# Altium PCB BeagleBone_adapter.PcbDoc (part 1 of 2)
Units mm, origin at the board's own origin, x right, y up, seen from the top; angles counter-clockwise.
Board outline 72.96 x 54.66 mm, 2 copper layers (Top Layer, Bottom Layer), stack 1.071 mm thick; 99 components, 121 nets, 467 pads, 161 vias.
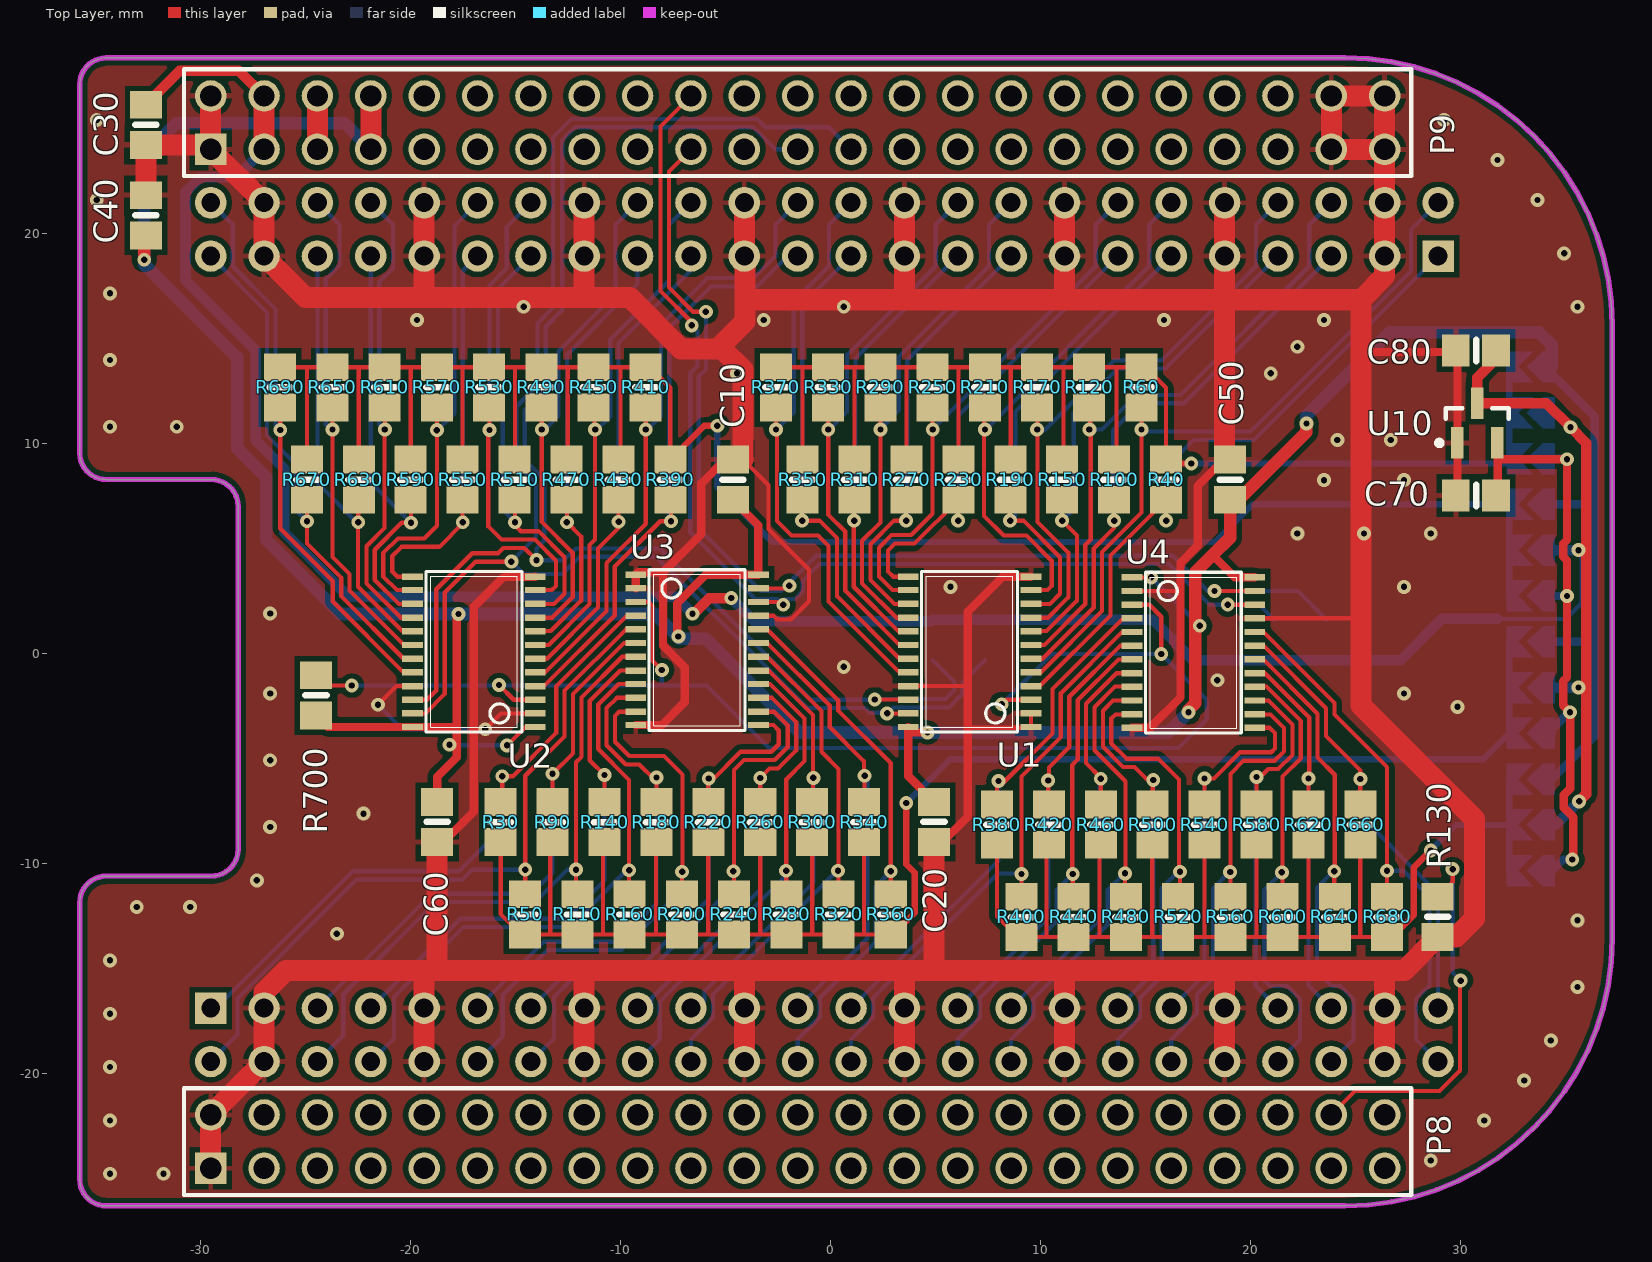
[diagram p0: Top Layer view]
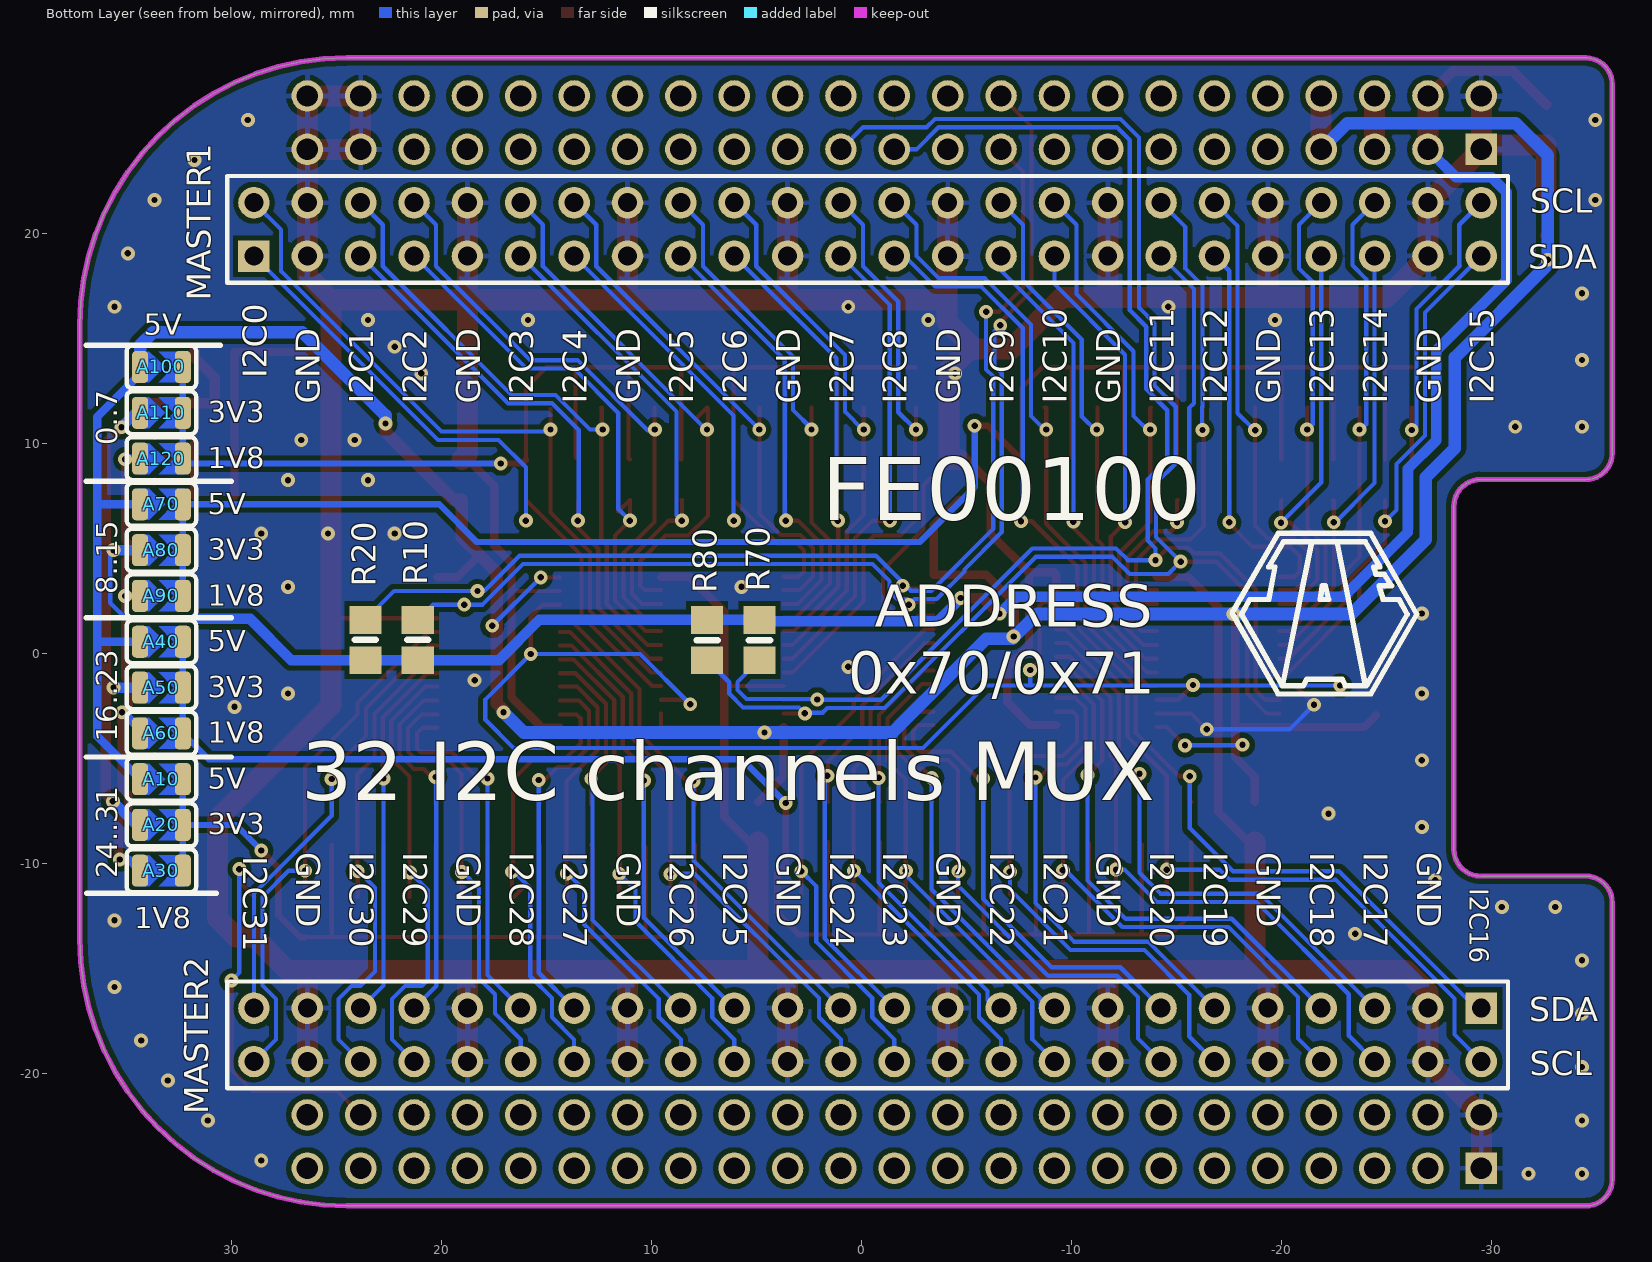
[diagram p1: Bottom Layer view, seen from below]

## Layer stack, top to bottom
Top Solder: solder mask 0.0102, Solder Resist, Dk 3.5
Top Layer: signal copper 0.0356
Dielectric1: core 1, FR-4, Dk 4.8
Bottom Layer: signal copper 0.0356
Bottom Solder: solder mask 0.0102, Solder Resist, Dk 3.5

## Board outline
-35.738,-25.021 ccw(c-34.468,-25.021) -34.468,-26.291 -23.752,-26.291 24.492,-26.284 24.492,-26.296 25.602,-26.248 26.702,-26.103 27.786,-25.862 28.845,-25.529 29.87,-25.104 30.855,-24.591 31.791,-23.995 32.672,-23.319 33.49,-22.569 34.24,-21.751 34.916,-20.87 35.512,-19.934 36.025,-18.949 36.45,-17.923 36.784,-16.865 37.024,-15.781 37.169,-14.68 37.217,-13.571 37.205,15.639 37.217,15.639 37.169,16.748 37.024,17.848 36.784,18.932 36.45,19.991 36.025,21.017 35.512,22.001 34.916,22.937 34.24,23.818 33.49,24.637 32.672,25.387 31.791,26.062 30.855,26.659 29.87,27.171 28.845,27.596 27.786,27.93 26.702,28.17 25.602,28.315 24.492,28.364 -26.957,28.354 -34.468,28.354 ccw(c-34.468,27.084) -35.738,27.084 -35.738,9.55 ccw(c-34.468,9.55) -34.468,8.28 -29.464,8.28 cw(c-29.464,7.01) -28.194,7.01 -28.194,-9.322 cw(c-29.464,-9.322) -29.464,-10.592 -34.468,-10.592 ccw(c-34.468,-11.862) -35.738,-11.862

## Design rules (kind name [scope] priority, off if disabled: settings)
Clearance Clearance_1 [All vs InPolygon] p1: gap=0.25
Clearance [All] p2: gap=0.2
ComponentClearance [All] p1 off: gap=0.254 collisioncheckmode=3 verticalgap=0.254 showdistances=FALSE
Height [All] p1: minheight=0 maxheight=50 prefheight=12.7
HoleSize [All] p1: absolutevalues=TRUE maxlimit=4.2 minlimit=0.025 maxpercent=80.000 minpercent=20.000
PolygonConnect PolygonConnect_2 [InNet('CHAIN1') or InNet('CHAIN2') or InNet('CHAIN3') or InNet('ISL_SUPPLY')] p1: connectstyle=Direct reliefconductorwidth=0.254 reliefentries=4 polygonreliefangle="90 Angle" airgapwidth=0.254
PolygonConnect [ispad] p2: connectstyle=Relief reliefconductorwidth=0.254 reliefentries=4 polygonreliefangle="90 Angle" airgapwidth=0.254
PolygonConnect PolygonConnect_1 [All] p3: connectstyle=Direct reliefconductorwidth=0.254 reliefentries=4 polygonreliefangle="90 Angle" airgapwidth=0.254
RoutingVias [All] p1: holewidth=0.3 width=0.6 viastyle="Through Hole" minholewidth=0.2 minwidth=0.5 maxholewidth=3.81 maxwidth=5.08
SilkToBoardRegionClearance [All] p1 off:
SilkToSilkClearance [All] p1 off: silktosilkclearance=0.254
SilkToSolderMaskClearance SilkscreenOverComponentPads [IsPad] p1 off: minsilkscreentomaskgap=0.254 clearancetoexposedcopper=TRUE
SolderMaskExpansion [All] p1: expansion=0.102
UnpouredPolygon [All] p1: allowunpoured=FALSE
Width [All] p1: maxlimit=10 minlimit=0.15 preferedwidth=0.3 minimp=50.000000 maximp=50.000000 favimp=50.000000
23 further rules are at their usual default settings.

## Components (designator, comment, footprint, x,y, rotation, side; value= is the part's Value field where it differs from the comment)
A10 "SOLDERJUMPER" SOLDERJUMPER_ARROW_NOPASTE 33.325,-5.978 r180 bottom
A20 "SOLDERJUMPER" SOLDERJUMPER_ARROW_NOPASTE 33.325,-8.158 r180 bottom
A30 "SOLDERJUMPER" SOLDERJUMPER_ARROW_NOPASTE 33.325,-10.338 r180 bottom
A40 "SOLDERJUMPER" SOLDERJUMPER_ARROW_NOPASTE 33.325,0.561 r180 bottom
A50 "SOLDERJUMPER" SOLDERJUMPER_ARROW_NOPASTE 33.325,-1.619 r180 bottom
A60 "SOLDERJUMPER" SOLDERJUMPER_ARROW_NOPASTE 33.325,-3.798 r180 bottom
A70 "SOLDERJUMPER" SOLDERJUMPER_ARROW_NOPASTE 33.325,7.1 r180 bottom
A80 "SOLDERJUMPER" SOLDERJUMPER_ARROW_NOPASTE 33.325,4.921 r180 bottom
A90 "SOLDERJUMPER" SOLDERJUMPER_ARROW_NOPASTE 33.325,2.741 r180 bottom
A100 "SOLDERJUMPER" SOLDERJUMPER_ARROW_NOPASTE 33.325,13.64 r180 bottom
A110 "SOLDERJUMPER" SOLDERJUMPER_ARROW_NOPASTE 33.325,11.46 r180 bottom
A120 "SOLDERJUMPER" SOLDERJUMPER_ARROW_NOPASTE 33.325,9.28 r180 bottom
C10 "Cap Semi" 0805-NO -4.648,8.265 r90 top
C20 "Cap Semi" 0805-NO 4.928,-8.011 r270 top
C30 "Cap Semi" 0805-no -32.588,25.171 r270 top
C40 "Cap Semi" 0805-no -32.588,20.853 r90 top
C50 "Cap Semi" 0805-NO 19.025,8.265 r90 top
C60 "Cap Semi" 0805-NO -18.72,-8.011 r270 top
C70 "Cap Semi" 0805-NO 30.734,7.518 r180 top
C80 "Cap Semi" 0805-NO 30.734,14.427 r180 top
MASTER1 "Header 24X2" HDR2X24 28.92,18.92 r180 bottom locked
MASTER2 "Header 24X2" HDR2X24 -29.5,-16.88 r0 bottom locked
P8 "Header 23x2 IDC" tlw-125-05-g-d -29.5,-24.5 r0 top
P9 "Header 23x2 IDC" tlw-125-05-g-d -29.5,24 r0 top
R10 "Res2" 0805-NO 21.124,0.65 r270 bottom
R20 "Res2" 0805-NO 23.622,0.65 r270 bottom
R30 "Res2" 0805-NO -15.697,-8.026 r90 top
R40 "Res2" 0805-NO 15.972,8.28 r270 top
R50 "Res2" 0805-NO -14.529,-12.421 r90 top
R60 "Res2" 0805-NO 14.803,12.675 r270 top
R70 "Res2" 0805-NO 4.851,0.635 r90 bottom
R80 "Res2" 0805-NO 7.349,0.635 r90 bottom
R90 "Res2" 0805-NO -13.226,-8.026 r90 top
R100 "Res2" 0805-NO 13.501,8.28 r270 top
R110 "Res2" 0805-NO -12.043,-12.421 r90 top
R120 "Res2" 0805-NO 12.318,12.675 r270 top
R130 "Res2" 0805-no 28.905,-12.532 r270 top
R140 "Res2" 0805-NO -10.755,-8.026 r90 top
R150 "Res2" 0805-NO 11.03,8.28 r270 top
R160 "Res2" 0805-NO -9.558,-12.421 r90 top
R170 "Res2" 0805-NO 9.832,12.675 r270 top
R180 "Res2" 0805-NO -8.284,-8.026 r90 top
R190 "Res2" 0805-NO 8.559,8.28 r270 top
R200 "Res2" 0805-NO -7.072,-12.421 r90 top
R210 "Res2" 0805-NO 7.347,12.675 r270 top
R220 "Res2" 0805-NO -5.813,-8.026 r90 top
R230 "Res2" 0805-NO 6.088,8.28 r270 top
R240 "Res2" 0805-NO -4.587,-12.421 r90 top
R250 "Res2" 0805-NO 4.861,12.675 r270 top
R260 "Res2" 0805-NO -3.342,-8.026 r90 top
R270 "Res2" 0805-NO 3.617,8.28 r270 top
R280 "Res2" 0805-NO -2.101,-12.421 r90 top
R290 "Res2" 0805-NO 2.376,12.675 r270 top
R300 "Res2" 0805-NO -0.871,-8.026 r90 top
R310 "Res2" 0805-NO 1.146,8.28 r270 top
R320 "Res2" 0805-NO 0.384,-12.421 r90 top
R330 "Res2" 0805-NO -0.11,12.675 r270 top
R340 "Res2" 0805-NO 1.6,-8.026 r90 top
R350 "Res2" 0805-NO -1.325,8.28 r270 top
R360 "Res2" 0805-NO 2.87,-12.421 r90 top
R370 "Res2" 0805-NO -2.595,12.675 r270 top
R380 "Res2" 0805-NO 7.925,-8.153 r90 top
R390 "Res2" 0805-NO -7.625,8.28 r270 top
R400 "Res2" 0805-NO 9.093,-12.548 r90 top
R410 "Res2" 0805-NO -8.793,12.675 r270 top
R420 "Res2" 0805-NO 10.396,-8.153 r90 top
R430 "Res2" 0805-NO -10.096,8.28 r270 top
R440 "Res2" 0805-NO 11.579,-12.548 r90 top
R450 "Res2" 0805-NO -11.279,12.675 r270 top
R460 "Res2" 0805-NO 12.867,-8.153 r90 top
R470 "Res2" 0805-NO -12.567,8.28 r270 top
R480 "Res2" 0805-NO 14.064,-12.548 r90 top
R490 "Res2" 0805-NO -13.764,12.675 r270 top
R500 "Res2" 0805-NO 15.338,-8.153 r90 top
R510 "Res2" 0805-NO -15.038,8.28 r270 top
R520 "Res2" 0805-NO 16.55,-12.548 r90 top
R530 "Res2" 0805-NO -16.25,12.675 r270 top
R540 "Res2" 0805-NO 17.809,-8.153 r90 top
R550 "Res2" 0805-NO -17.509,8.28 r270 top
R560 "Res2" 0805-NO 19.035,-12.548 r90 top
R570 "Res2" 0805-NO -18.735,12.675 r270 top
R580 "Res2" 0805-NO 20.28,-8.153 r90 top
R590 "Res2" 0805-NO -19.98,8.28 r270 top
R600 "Res2" 0805-NO 21.521,-12.548 r90 top
R610 "Res2" 0805-NO -21.221,12.675 r270 top
R620 "Res2" 0805-NO 22.751,-8.153 r90 top
R630 "Res2" 0805-NO -22.451,8.28 r270 top
R640 "Res2" 0805-NO 24.006,-12.548 r90 top
R650 "Res2" 0805-NO -23.706,12.675 r270 top
R660 "Res2" 0805-NO 25.222,-8.153 r90 top
R670 "Res2" 0805-NO -24.922,8.28 r270 top
R680 "Res2" 0805-NO 26.492,-12.548 r90 top
R690 "Res2" 0805-NO -26.192,12.675 r270 top
R700 "Res2" 0805-NO -24.486,-1.981 r270 top
U1 "TCA9548APWR" TSSOP24 6.625,0.076 r90 top
U2 "TCA9548APWR" TSSOP24 -16.972,0.076 r90 top
U3 "TCA9548APWR" TSSOP24 -6.35,0.178 r270 top
U4 "TCA9548APWR" TSSOP24 17.272,0.051 r270 top
U10 "MCP1700T-1802E/TT" SOT-23-TT3_N 30.785,10.973 r90 top

## Footprints (in the part's own frame and the unit in brackets; to place one, negate y for a bottom-side part, rotate by r counter-clockwise, add the part's x,y. Pads: shape width x height; smd on the part's side, far side on the other; paste and mask are expansions set on the pad)
0805-NO [mil] "0805-NO"
  rect 52x60 smd: 1(-37.4,0) 2(38,0)
  silkscreen extent 0,-20 0,20
0805-no [mil] "0805-NO"
  rect 52x60 smd: 1(-37.4,0) 2(38,0)
  silkscreen extent 0,-20 0,20
HDR2X24 [mm] "Connector; Header; 24x2 Position"
  rect 1.5x1.5 hole 0.9: 1(0,0)
  round 1.5 hole 0.9: 2(0,2.54) 3(2.54,0) 4(2.54,2.54) 5(5.08,0) 6(5.08,2.54) 7(7.62,0) 8(7.62,2.54) 9(10.16,0) 10(10.16,2.54) 11(12.7,0) 12(12.7,2.54) 13(15.24,0) 14(15.24,2.54) 15(17.78,0) 16(17.78,2.54) 17(20.32,0) 18(20.32,2.54) 19(22.86,0) 20(22.86,2.54) 21(25.4,0) 22(25.4,2.54) 23(27.94,0) 24(27.94,2.54) 25(30.48,0) 26(30.48,2.54) 27(33.02,0) 28(33.02,2.54) 29(35.56,0) 30(35.56,2.54) 31(38.1,0) 32(38.1,2.54) 33(40.64,0) 34(40.64,2.54) 35(43.18,0) 36(43.18,2.54) 37(45.72,0) 38(45.72,2.54) 39(48.26,0) 40(48.26,2.54) 41(50.8,0) 42(50.8,2.54) 43(53.34,0) 44(53.34,2.54) 45(55.88,0) 46(55.88,2.54) 47(58.42,0) 48(58.42,2.54)
  silkscreen extent -1.27,-1.27 59.69,3.81
SOLDERJUMPER_ARROW_NOPASTE [mil] "SOLDERJUMPER_ARROW_NOPASTE"
  rrect50% 30x60 smd: 1(-40,0) 2(40,0)
  Top Layer region: -45,29 -22.5,29 7,0 -22.5,-29 -45,-29
  Top Layer region: -5,29 23,0 -5,-29 45,-29 45,29
  silkscreen extent -65,-40 65,40
SOT-23-TT3_N [mm] "SOT23, 3-Leads, Body 2.9x1.3mm, Pitch 0.95mm, Lead Span 2.4mm, IPC Medium Density"
  rect 1.5x0.6 smd: 1(-0.95,0.95) 2(-0.95,-0.95) 3(0.95,0)
  silkscreen extent -1.07,-1.5 0.7,1.92, body extent -0.7,-1.5 0.7,1.5, height 1.12
tlw-125-05-g-d [mm] "pin-header-46-male"
  rect 1.5x1.5 hole 1.016: 1(0,0)
  round 1.5 hole 1.016: 2(0,2.54) 3(2.54,0) 4(2.54,2.54) 5(5.08,0) 6(5.08,2.54) 7(7.62,0) 8(7.62,2.54) 9(10.16,0) 10(10.16,2.54) 11(12.7,0) 12(12.7,2.54) 13(15.24,0) 14(15.24,2.54) 15(17.78,0) 16(17.78,2.54) 17(20.32,0) 18(20.32,2.54) 19(22.86,0) 20(22.86,2.54) 21(25.4,0) 22(25.4,2.54) 23(27.94,0) 24(27.94,2.54) 25(30.48,0) 26(30.48,2.54) 27(33.02,0) 28(33.02,2.54) 29(35.56,0) 30(35.56,2.54) 31(38.1,0) 32(38.1,2.54) 33(40.64,0) 34(40.64,2.54) 35(43.18,0) 36(43.18,2.54) 37(45.72,0) 38(45.72,2.54) 39(48.26,0) 40(48.26,2.54) 41(50.8,0) 42(50.8,2.54) 43(53.34,0) 44(53.34,2.54) 45(55.88,0) 46(55.88,2.54)
  silkscreen extent -1.27,-1.27 57.15,3.81
TSSOP24 [mil] "TSSOP24"
  rect 12x39 smd: 1(-140.75,-114.87) 2(-115.16,-114.87) 3(-89.57,-114.87) 4(-63.98,-114.87) 5(-38.39,-114.87) 6(-12.8,-114.87) 7(13,-114.87) 8(39,-114.87) 9(64,-114.87) 10(90,-114.87) 11(116,-114.87) 12(141,-114.87) 13(141,115) 14(116,115) 15(90,115) 16(64,115) 17(39,115) 18(13,115) 19(-12.8,115) 20(-38.39,115) 21(-63.98,115) 22(-89.57,115) 23(-115.16,115) 24(-140.75,115)
  silkscreen extent -150,-90 151,90

## Part data
A10 A20 A30 A40 A50 A60 A70 A80 A90 A100 A110 A120: "<p><b>SMD Solder JUMPER</b></p> / <p>Solder the two pads together to create a connection, or remove the solder to break it.</p> / <b>REFLOW</b> - Use this footprint for solder paste and reflow ovens.<br/> / <b>WAVE</b> - Use this footprint for hand-soldering (larger pads). / <p><b>CLOSED</b> - Has a trace between the two pads to ensure it is closed by default.  The trace needs to be cut to disable the jumper, and can be closed again by creating a solder bridge between the two pads.</p>"
C10 C20 C30 C40 C50 C60 C70 C80: "Capacitor (Semiconductor SIM Model)"
MASTER1 MASTER2: "Header, 24-Pin, Dual row"
P8 P9: library part HW-23-20-G-D-865-SM, "header,46 way,2.54mm"
R10 R20 R30 R40 R50 R60 R70 R80 R90 R100 R110 R120 R130 R140 R150 R160 R170 R180 R190 R200 R210 R220 R230 R240 R250 R260 R270 R280 R290 R300 R310 R320 R330 R340 R350 R360 R370 R380 R390 R400 R410 R420 R430 R440 R450 R460 R470 R480 R490 R500 R510 R520 R530 R540 R550 R560 R570 R580 R590 R600 R610 R620 R630 R640 R650 R660 R670 R680 R690 R700: "Resistor"
U1 U2 U3 U4: library part TCA9548A, "<p><b>TCA9548A I2C Multiplexer</b><p>"
U10: "Low Quiescent Current LDO, 3-Pin SOT-23, Extended Temperature, Tape and Reel"

## Via types
v1: diameter 0.66, hole 0.3, Top Layer to Bottom Layer, tented both sides, 161 vias

## Nets (pads, with @x,y where several pads share a name; then routed paths per layer and width w, separated by ;. In a path a pad name is that pad's centre, name@x,y a point inside that pad or via, vN(x,y) a via of type N, cw(c..) or ccw(c..) an arc to the next point about the centre after c; other vN are vias at no path point)
0SCL: MASTER1.2 R60.2 U1.5 | length 34.8
  Top Layer w0.2: U1.5@9.542,-0.899 10.012,-0.899 12.93,2.02 12.93,4.839 14.803,6.712 v1@14.803,10.744 ; R60.2@14.803,11.633 14.803,10.749 v1@14.808,10.744
  Bottom Layer w0.2: v1@14.808,10.744 14.986,10.566 20.001,10.566 27.635,18.201 27.635,20.175 MASTER1.2@28.92,21.46
  other v1: 14.808,10.668
0SCL2: MASTER2.2 R50.2 U3.5 | length 35
  Top Layer w0.2: R50.2@-14.605,-11.455 -14.529,-11.379 v1(-14.529,-10.287) -14.529,-5.817 -12.656,-3.943 -12.656,-1.766 -9.737,1.153 U3.5@-9.268,1.153
  Bottom Layer w0.2: MASTER2.2@-29.5,-19.42 -28.219,-18.139 -28.219,-16.415 -22.567,-10.763 -17.513,-10.763 -17.037,-10.287 -14.605,-10.287 -14.529,-10.211 v1(-14.529,-10.287)
0SDA: MASTER1.1 R40.2 U1.4 | length 32.4
  Top Layer w0.2: U1.4@9.542,-1.549 9.964,-1.549 13.33,1.817 13.33,4.674 R40.2@15.972,7.315 15.977,7.31 v1(15.977,6.325)
  Bottom Layer w0.2: v1(15.977,6.325) 15.977,8.865 17.278,10.166 20.166,10.166 MASTER1.1@28.92,18.92
0SDA2: MASTER2.1 R30.2 U3.4 | length 32
  Top Layer w0.2: R30.2@-15.697,-7.061 -15.621,-6.985 v1(-15.621,-5.842) -15.12,-5.842 -13.056,-3.778 -13.056,-1.563 -9.69,1.803 U3.4@-9.268,1.803
  Bottom Layer w0.2: MASTER2.1@-29.5,-16.88 -29.25,-16.88 -22.733,-10.363 -17.678,-10.363 -15.621,-8.306 v1(-15.621,-5.842)
1SCL: MASTER1.6 R120.2 U1.7 | length 30.1
  Top Layer w0.2: U1.7@9.542,0.406 10.185,0.406 12.13,2.351 12.13,5.171 12.39,5.431 v1@12.39,10.439 ; R120.2@12.369,11.709 12.39,11.688 12.37,11.667 v1@12.37,10.439
  Bottom Layer w0.2: v1@12.37,10.439 12.598,10.668 12.922,10.668 14.566,12.313 16.667,12.313 22.79,18.436 22.79,20.41 MASTER1.6@23.84,21.46
  other v1: 12.323,10.668
1SCL2: MASTER2.6 R110.2 U3.7 | length 30.1
  Top Layer w0.2: R110.2@-12.094,-11.455 -12.116,-11.434 v1(-12.116,-10.287) -12.116,-5.177 -11.856,-4.917 -11.856,-2.097 -9.911,-0.152 U3.7@-9.268,-0.152
  Bottom Layer w0.2: MASTER2.6@-24.42,-19.42 -23.19,-18.19 -23.19,-16.216 -18.804,-11.83 -14.058,-11.83 -12.515,-10.287 v1(-12.116,-10.287)
1SDA: MASTER1.5 R100.2 U1.6 | length 27.3
  Top Layer w0.2: U1.6@9.542,-0.249 10.096,-0.249 12.53,2.186 12.53,5.005 13.501,5.976 ; v1@13.462,6.325 13.501,6.363 R100.2@13.501,7.315
  Bottom Layer w0.2: v1@13.462,6.325 13.462,10.643 14.732,11.913 16.833,11.913 MASTER1.5@23.84,18.92
  other v1: 13.502,6.325
1SDA2: MASTER2.5 R90.2 U3.6 | length 28.1
  Top Layer w0.2: R90.2@-13.226,-7.061 v1(-13.226,-5.722) -12.256,-4.751 -12.256,-1.932 -9.821,0.503 U3.6@-9.268,0.503
  Bottom Layer w0.2: MASTER2.5@-24.42,-16.88 -18.97,-11.43 -14.224,-11.43 -13.226,-10.432 v1(-13.226,-5.722)
1V8: A30.1 A60.1 A90.1 A120.1 C70.1 U10.2 | length 30.5
  Top Layer w0.4: C70.1@31.76,7.518 31.76,9.997 U10.2@31.735,10.023 31.735,9.616 U10.2@31.76,9.591 ; 31.76,9.261 31.775,9.246 v1(35.059,9.246) 35.059,5.408 34.874,5.223 34.874,4.618 35.059,4.433 35.059,-1.131 34.874,-1.316 34.874,-2.463 v1(35.204,-2.794) 35.204,-6.435 34.906,-6.733 34.906,-7.338 35.357,-7.789 35.357,-9.754 v1(35.306,-9.804)
  Bottom Layer w0.4: A30.1@34.341,-10.338 34.874,-9.804 v1(35.306,-9.804) ; A60.1@34.341,-3.798 34.149,-3.798 35.154,-2.794 v1(35.204,-2.794) v1@35.204,-2.935 ; A90.1@34.341,2.741 v1(35.057,2.741) ; A120.1@34.341,9.28 35.094,9.28 v1(35.059,9.246)
2SCL: MASTER1.8 R170.2 U1.9 | length 28.9
  Top Layer w0.2: U1.9@9.542,1.702 10.349,1.702 11.33,2.683 11.33,4.794 9.858,6.267 v1@9.858,10.62 ; v1@9.855,10.617 v1@9.858,10.62 ; R170.2@9.858,11.709 v1@9.858,10.62
  Bottom Layer w0.2: v1@9.855,10.617 10.179,10.617 13.525,13.964 15.778,13.964 20.25,18.436 20.25,20.41 MASTER1.8@21.3,21.46
  other v1: 9.837,10.668
2SCL2: MASTER2.8 R160.2 U3.9 | length 29.1
  Top Layer w0.2: R160.2@-9.583,-11.455 v1(-9.583,-10.312) -9.583,-6.013 -11.056,-4.54 -11.056,-2.429 -10.075,-1.448 U3.9@-9.268,-1.448
  Bottom Layer w0.2: MASTER2.8@-21.88,-19.42 -20.777,-18.317 -20.777,-16.343 -17.458,-13.024 -12.407,-13.024 -9.696,-10.312 v1(-9.583,-10.312)
2SDA: MASTER1.7 R150.2 U1.8 | length 26.8
  Top Layer w0.2: U1.8@9.542,1.067 10.28,1.067 11.73,2.517 11.73,5.622 v1(11.027,6.325) 11.027,7.313 R150.2@11.03,7.315 R150.2@11.582,6.763
  Bottom Layer w0.2: v1(11.027,6.325) 11.582,6.88 11.582,11.455 13.691,13.564 15.944,13.564 MASTER1.7@21.3,18.92
2SDA2: MASTER2.7 R140.2 U3.8 | length 26.5
  Top Layer w0.2: R140.2@-10.755,-7.061 v1(-10.755,-5.783) -11.456,-5.082 -11.456,-2.263 -10.005,-0.813 U3.8@-9.268,-0.813
  Bottom Layer w0.2: MASTER2.7@-21.88,-16.88 -17.624,-12.624 -12.573,-12.624 -10.755,-10.806 v1(-10.755,-5.783)
3SCL: MASTER1.12 R210.2 U1.11 | length 26.7
  Top Layer w0.2: R210.2@7.849,11.208 R210.2@7.347,11.709 7.31,11.673 7.31,6.553 8.25,5.613 9.336,5.613 10.53,4.419 10.53,3.221 10.332,3.023 U1.11@9.542,3.023
  Bottom Layer w0.2: v1(7.351,10.668) 7.402,10.668 15.17,18.436 15.17,20.41 MASTER1.12@16.22,21.46
3SCL2: MASTER2.12 R200.2 U3.11 | length 27
  Top Layer w0.2: U3.11@-9.268,-2.769 -10.057,-2.769 -10.256,-2.967 -10.256,-4.197 -9.576,-4.877 -7.925,-4.877 -7.036,-5.766 v1@-7.036,-10.399 ; R200.2@-7.072,-11.455 -7.072,-10.399 v1(-7.061,-10.389)
  Bottom Layer w0.2: MASTER2.12@-16.8,-19.42 -15.596,-18.216 -15.596,-16.241 -13.47,-14.116 -9.95,-14.116 -7.061,-11.227 v1(-7.061,-10.389)
3SDA: MASTER1.11 R190.2 U1.10 | length 23.2
  Top Layer w0.2: R190.2@8.559,7.315 8.553,7.309 v1(8.553,6.325) 9.19,6.325 10.93,4.584 10.93,2.848 10.444,2.362 U1.10@9.542,2.362
  Bottom Layer w0.2: v1(8.553,6.325) 8.814,6.586 8.814,11.514 MASTER1.11@16.22,18.92
3SDA2: MASTER2.11 R180.2 U3.10 | length 23.9
  Top Layer w0.2: U3.10@-9.268,-2.108 -10.169,-2.108 -10.656,-2.594 -10.656,-4.363 -9.741,-5.277 -9.1,-5.277 v1@-8.382,-5.994 ; R180.2@-8.284,-7.061 v1@-8.284,-6.092
  Bottom Layer w0.2: MASTER2.11@-16.8,-16.88 -13.636,-13.716 -10.116,-13.716 -8.28,-11.88 -8.28,-5.893 v1(-8.284,-5.896)
3V3: A20.1 A50.1 A80.1 A110.1 C30.1 C80.1 P9.3 P9.4 R10.2 R20.2 R70.2 R80.2 U10.3 | length 132.7
  Top Layer w0.2: P9.4@-26.96,26.54 P9.4@-26.96,26.99
  Top Layer w0.5: C30.1@-32.588,26.121 -30.97,27.74 -28.16,27.74 P9.4@-26.96,26.54 ; v1(-6.567,1.894) -6.516,1.894 -5.769,2.642 v1(-4.724,2.642) ; C80.1@31.735,14.427 31.735,14.082 30.785,13.132 U10.3@30.785,11.923 34.077,11.923 v1(35.23,10.77) 35.984,10.015 35.984,-6.688 v1(35.636,-7.036)
  Top Layer w1: P9.3@-26.96,24 P9.4@-26.96,26.54
  Bottom Layer w0.2: 31.731,1.651 35.001,1.651 35.763,2.413 35.763,4.761 v1(35.604,4.921)
  Bottom Layer w0.5: P9.3@-26.96,24 -28.3,22.66 -29.997,22.66 -30.7,21.957 -30.7,17.771 -27.367,14.439 -27.367,10.154 -26.01,8.796 -26.01,5.766 -22.936,2.692 -7.366,2.692 v1(-6.567,1.894) ; v1(-4.724,2.642) -3.625,1.542 4.794,1.542 R70.2@4.851,1.6 R80.2@7.349,1.6 15.342,1.6 17.257,-0.315 R10.2@21.124,-0.315 R20.2@23.622,-0.315 27.142,-0.315 29.108,1.651 31.731,1.651 ; A20.1@34.341,-8.158 34.514,-8.158 v1(35.636,-7.036) ; A50.1@34.341,-1.619 v1(35.604,-1.619) ; A80.1@34.341,4.921 v1(35.604,4.921) ; A110.1@34.341,11.46 34.539,11.46 v1(35.23,10.77)
4SCL: MASTER1.14 R250.2 U1.14 | length 25.8
  Top Layer w0.2: U1.14@3.704,3.023 2.958,3.023 2.307,3.674 2.307,5.036 2.909,5.639 3.846,5.639 4.861,6.654 R250.2@4.861,11.709
  Bottom Layer w0.2: v1@4.861,10.698 4.877,10.682 12.63,18.436 12.63,20.41 MASTER1.14@13.68,21.46
  other v1: 4.866,10.668
4SCL2: MASTER2.14 R240.2 U3.14 | length 26.6
  Top Layer w0.2: v1(-4.623,-10.363) v1@-4.587,-10.399 ; R240.2@-4.587,-11.455 v1@-4.587,-10.399 ; U3.14@-3.429,-2.769 -2.683,-2.769 -2.032,-3.42 -2.032,-4.452 -2.654,-5.074 -4.108,-5.074 -4.587,-5.552 v1@-4.587,-10.399
  Bottom Layer w0.2: MASTER2.14@-14.26,-19.42 -13.157,-18.317 -13.157,-16.343 -12.15,-15.335 -8.884,-15.335 -4.597,-11.049 -4.597,-10.389 v1(-4.623,-10.363)
4SDA: MASTER1.13 R230.2 U1.13 | length 23.1
  Top Layer w0.2: U1.13@3.704,3.658 2.992,3.658 2.738,3.912 2.738,4.902 3.069,5.232 4.005,5.232 R230.2@6.088,7.315 6.096,7.307 v1@6.096,6.325
  Bottom Layer w0.2: v1@6.096,6.325 6.096,11.336 MASTER1.13@13.68,18.92
  other v1: 6.078,6.325
4SDA2: MASTER2.13 R220.2 U3.13 | length 23.1
  Top Layer w0.2: R220.2@-5.813,-7.061 -5.813,-5.966 v1(-5.791,-5.944) ; v1@-5.668,-6.067 -4.274,-4.674 -2.819,-4.674 -2.464,-4.318 -2.464,-3.658 -2.718,-3.404 U3.13@-3.429,-3.404
  Bottom Layer w0.2: MASTER2.13@-14.26,-16.88 -12.315,-14.935 -9.049,-14.935 -5.791,-11.677 v1(-5.791,-5.944)
5SCL: MASTER1.18 R290.2 U1.16 | length 25
  Top Layer w0.2: v1@2.362,10.668 2.376,10.682 2.376,6.237 1.507,5.367 1.507,3.342 3.147,1.702 U1.16@3.704,1.702 ; R290.2@2.376,11.709 2.38,11.705 v1(2.38,10.668)
  Bottom Layer w0.2: v1@2.362,10.668 2.371,10.677 2.371,10.702 3.258,11.589 3.258,14.143 7.55,18.436 7.55,20.41 MASTER1.18@8.6,21.46
5SCL2: MASTER2.18 R280.2 U3.16 | length 23.6
  Top Layer w0.2: U3.16@-3.429,-1.448 -2.872,-1.448 -1.232,-3.088 -1.232,-5.113 -2.101,-5.983 v1@-2.101,-10.345 ; v1(-2.108,-10.338) v1@-2.101,-10.345 ; R280.2@-2.101,-11.455 v1@-2.101,-10.345
  Bottom Layer w0.2: MASTER2.18@-9.18,-19.42 -8.13,-18.37 -8.13,-16.588 -2.108,-10.566 v1(-2.108,-10.338)
5SDA: MASTER1.17 R270.2 U1.15 | length 21.7
  Top Layer w0.2: v1@3.531,6.375 3.617,6.462 R270.2@3.617,7.315 ; v1(3.603,6.325) 3.029,6.325 1.907,5.202 1.907,3.508 3.052,2.362 U1.15@3.704,2.362
  Bottom Layer w0.2: v1@3.531,6.375 3.658,6.502 3.658,13.978 MASTER1.17@8.6,18.92
5SDA2: MASTER2.17 R260.2 U3.15 | length 20.8
  Top Layer w0.2: U3.15@-3.429,-2.108 -2.778,-2.108 -1.632,-3.254 -1.632,-4.618 -2.488,-5.474 -2.908,-5.474 -3.342,-5.908 v1(-3.342,-5.929) R260.2@-3.342,-7.061
  Bottom Layer w0.2: MASTER2.17@-9.18,-16.88 -8.53,-16.88 -8.53,-16.423 -3.327,-11.22 -3.327,-5.944 v1(-3.342,-5.929)
5V: P9.5 P9.6 | length 2.5
  Top Layer w1: P9.5@-24.42,24 P9.6@-24.42,26.54
5V_USB: A10.1 A40.1 A70.1 A100.1 C10.1 C20.1 C40.1 C50.1 C60.1 P9.7 P9.8 R700.2 U1.24 U2.1 U2.24 U3.24 U4.1 U4.24 | length 184.1
  Top Layer w0.2: -21.057,-3.473 -21.031,-3.499 ; v1(-18.136,-4.343) -18.11,-4.369 -17.78,-4.369 ; v1(-15.392,-4.369) -14.522,-3.499 U2.1@-14.054,-3.499 ; U4.1@14.361,3.632 U4.1@14.354,3.626 v1(15.272,3.626) ; v1@17.362,1.321 v1(17.577,1.321)
  Top Layer w0.4: R700.2@-24.486,-2.946 -23.933,-3.499 -21.031,-3.499 U2.24@-19.893,-3.499 -17.812,-3.499 ; C60.1@-18.72,-7.061 -18.72,-5.867 -17.78,-4.928 -17.78,-4.369 -17.78,1.88 v1(-17.704,1.88) ; v1(-7.239,0.813) -7.297,0.871 -7.297,2.38 -5.925,3.753 U3.24@-3.429,3.753 -3.446,3.77 -3.446,6.113 C10.1@-4.648,7.315 ; v1(4.623,-3.759) 3.964,-3.759 U1.24@3.704,-3.499 3.704,-5.837 C20.1@4.928,-7.061 ; 18.193,4.681 19.248,3.626 U4.24@20.193,3.626
  Top Layer w0.6: v1(-32.664,18.745) -32.664,19.827 C40.1@-32.588,19.903 ; v1(17.043,-2.794) 17.043,-2.692 17.362,-2.373 17.362,1.321 17.362,3.85 18.193,4.681 19.025,5.512 C50.1@19.025,7.315 19.431,7.315 22.657,10.541 v1(22.657,10.947)
  Top Layer w1: P9.7@-21.88,24 P9.8@-21.88,26.54
  Bottom Layer w0.2: v1(-18.136,-4.343) -18.11,-4.369 v1(-15.392,-4.369) ; v1(15.272,3.626) v1(17.577,1.321)
  Bottom Layer w0.4: A10.1@34.341,-5.978 36.371,-3.948 36.371,11.28 34.341,13.31 A100.1@34.341,13.64 ; A40.1@34.341,0.561 36.244,0.561 ; A70.1@34.341,7.1 36.232,7.1
  Bottom Layer w0.6: P9.7@-21.88,24 -23.13,25.25 -31.138,25.25 -32.664,23.724 v1(-32.664,18.745) -32.664,18.517 -28.245,14.097 -28.245,9.779 -26.848,8.382 -26.848,5.41 -23.317,1.88 v1(-17.704,1.88) -8.357,1.88 -7.188,0.711 -5.944,0.711 -1.473,-3.759 v1(4.623,-3.759) 16.078,-3.759 v1(17.043,-2.794) ; v1(22.657,10.947) 22.657,11.328 26.619,15.291 33.731,15.291 34.341,14.681 A100.1@34.341,13.64
6SCL: MASTER1.20 R330.2 U1.18 | length 26.6
  Top Layer w0.2: v1@-0.127,10.643 v1@-0.11,10.66 ; R330.2@-0.11,11.709 v1@-0.11,10.66 ; U1.18@3.704,0.406 3.292,0.406 0.707,2.992 0.707,5.808 -0.11,6.624 v1@-0.11,10.66
  Bottom Layer w0.2: v1@-0.127,10.643 -0.102,10.617 0.794,11.513 0.794,14.219 5.01,18.436 5.01,20.41 MASTER1.20@6.06,21.46
  other v1: -0.105,10.668
6SCL2: MASTER2.20 R320.2 U3.18 | length 25.2
  Top Layer w0.2: U3.18@-3.429,-0.152 -3.017,-0.152 -0.432,-2.738 -0.432,-4.673 0.384,-5.49 v1@0.384,-10.363 ; v1(0.359,-10.338) v1@0.384,-10.363 ; R320.2@0.384,-11.455 v1@0.384,-10.363
  Bottom Layer w0.2: MASTER2.20@-6.64,-19.42 -6.64,-18.365 -5.59,-17.315 -5.59,-16.233 0.305,-10.338 v1(0.359,-10.338)
6SDA: MASTER1.19 R310.2 U1.17 | length 22.3
  Top Layer w0.2: v1@1.107,6.35 1.107,3.176 3.216,1.067 U1.17@3.704,1.067 ; v1(1.128,6.325) 1.128,7.298 R310.2@1.146,7.315
  Bottom Layer w0.2: v1@1.168,6.35 1.194,6.35 1.194,14.054 MASTER1.19@6.06,18.92
6SDA2: MASTER2.19 R300.2 U3.17 | length 21.2
  Top Layer w0.2: U3.17@-3.429,-0.813 -2.942,-0.813 -0.832,-2.922 v1@-0.832,-5.937 ; R300.2@-0.871,-7.061 -0.832,-7.022 v1@-0.832,-5.937 ; v1@-0.871,-5.977 v1@-0.832,-5.937 ; v1(-0.813,-5.918) v1@-0.832,-5.937
  Bottom Layer w0.2: MASTER2.19@-6.64,-16.88 -6.364,-16.88 -5.99,-16.506 -5.99,-16.067 -0.813,-10.89 v1(-0.813,-5.918)
7SCL: MASTER1.24 R370.2 U1.20 | length 28.5
  Top Layer w0.2: v1@-2.595,10.668 -2.546,10.619 -2.546,6.306 -1.854,5.613 -0.584,5.613 -0.093,5.123 -0.093,2.476 3.282,-0.899 U1.20@3.704,-0.899 ; R370.2@-2.595,11.709 -2.591,11.705 v1(-2.591,10.668)
  Bottom Layer w0.2: v1(-2.591,10.668) -2.578,10.655 -1.746,11.487 -1.746,16.759 -0.07,18.436 -0.07,20.41 MASTER1.24@0.98,21.46
7SCL2: MASTER2.24 R360.2 U3.20 | length 26.4
  Top Layer w0.2: U3.20@-3.429,1.153 -3.007,1.153 0.368,-2.222 0.368,-2.705 2.87,-5.207 v1(2.87,-10.363) R360.2@2.87,-11.455
  Bottom Layer w0.2: MASTER2.24@-1.56,-19.42 -1.56,-18.365 -0.51,-17.315 -0.51,-16.396 2.153,-13.733 2.153,-11.081 v1(2.87,-10.363)
7SDA: MASTER1.23 R350.2 U1.19 | length 24
  Top Layer w0.2: R350.2@-1.325,7.315 -1.346,7.294 v1(-1.346,6.325) -0.517,6.325 0.307,5.501 0.307,2.731 3.287,-0.249 U1.19@3.704,-0.249
  Bottom Layer w0.2: v1(-1.346,6.325) -1.346,16.594 MASTER1.23@0.98,18.92
7SDA2: MASTER2.23 R340.2 U3.19 | length 22.5
  Top Layer w0.2: U3.19@-3.429,0.503 -3.012,0.503 -0.032,-2.477 -0.032,-3.499 1.6,-5.13 v1@1.6,-5.817 ; R340.2@1.6,-7.061 1.626,-7.035 v1(1.626,-5.817)
  Bottom Layer w0.2: MASTER2.23@-1.56,-16.88 1.753,-13.567 1.753,-5.944 v1@1.575,-5.766
8SCL: MASTER1.26 R410.2 U2.5 | length 30.3
  Top Layer w0.2: U2.5@-14.054,-0.899 -13.585,-0.899 -10.666,2.02 -10.666,4.301 -8.793,6.174 v1(-8.793,10.668) R410.2@-8.793,11.709 ; R410.2@-8.755,11.671 R410.2@-8.717,11.709
  Bottom Layer w0.2: v1(-8.793,10.668) -8.793,10.597 -8.788,10.592 -8.071,11.309 -8.071,15.66 -5.86,17.87 -3.665,17.87 -2.61,18.925 -2.61,20.41 MASTER1.26@-1.56,21.46
8SCL2: MASTER2.26 R400.2 U4.5 | length 28.1
  Top Layer w0.2: R400.2@9.017,-11.582 9.093,-11.506 v1(9.093,-10.49) 9.093,-5.849 10.966,-3.976 10.966,-1.893 13.885,1.026 U4.5@14.354,1.026
  Bottom Layer w0.2: MASTER2.26@0.98,-19.42 0.98,-18.365 2.03,-17.315 2.03,-16.396 7.961,-10.465 9.093,-10.465 v1(9.093,-10.49)
8SDA: MASTER1.25 R390.2 U2.4 | length 28.9
  Top Layer w0.2: U2.4@-14.054,-1.549 -13.632,-1.549 -10.266,1.817 -10.266,4.135 -8.103,6.299 v1(-7.595,6.299) -7.595,7.285 R390.2@-7.625,7.315
  Bottom Layer w0.2: v1(-7.595,6.299) -7.671,6.375 -7.671,15.494 -5.695,17.47 -3.499,17.47 -2.21,18.759 -2.21,18.92 MASTER1.25@-1.56,18.92
8SDA2: MASTER2.25 R380.2 U4.4 | length 25.6
  Top Layer w0.2: R380.2@7.925,-7.188 7.925,-6.147 v1(8.001,-6.071) ; v1@8.153,-6.223 10.566,-3.81 10.566,-1.69 13.932,1.676 U4.4@14.354,1.676
  Bottom Layer w0.2: MASTER2.25@0.98,-16.88 8.001,-9.859 v1(8.001,-6.071)
9SCL: MASTER1.30 R450.2 U2.7 | length 25.8
  Top Layer w0.2: U2.7@-14.054,0.406 -13.411,0.406 -11.466,2.351 -11.466,5.171 -11.206,5.431 v1@-11.206,10.673 ; R450.2@-11.228,11.709 -11.228,10.695 v1@-11.206,10.673 ; v1(-11.201,10.668) v1@-11.206,10.673
  Bottom Layer w0.2: v1(-11.201,10.668) -11.201,10.566 -10.484,11.284 -10.484,14.948 -7.69,17.742 -7.69,20.41 MASTER1.30@-6.64,21.46
9SCL2: MASTER2.30 R440.2 U4.7 | length 24.1
  Top Layer w0.2: v1@11.506,-10.49 11.506,-5.304 11.766,-5.044 11.766,-2.224 13.711,-0.279 U4.7@14.354,-0.279 ; v1(11.532,-10.49) 11.532,-11.535 R440.2@11.579,-11.582
  Bottom Layer w0.2: MASTER2.30@6.06,-19.42 6.06,-18.365 7.11,-17.315 7.11,-16.396 10.763,-12.742 10.763,-11.259 v1(11.532,-10.49)
9SDA: MASTER1.29 R430.2 U2.6 | length 23.3
  Top Layer w0.2: U2.6@-14.054,-0.249 -13.501,-0.249 -11.066,2.186 -11.066,5.005 v1@-10.096,5.976 ; R430.2@-10.096,7.315 -10.096,6.286 v1(-10.084,6.274)
  Bottom Layer w0.2: v1(-10.084,6.274) -10.084,14.783 -6.64,18.227 MASTER1.29@-6.64,18.92
9SDA2: MASTER2.29 R420.2 U4.6 | length 22.2
  Top Layer w0.2: v1(10.363,-6.045) 10.363,-7.156 R420.2@10.396,-7.188 ; v1@10.396,-6.045 10.396,-5.428 11.366,-4.458 11.366,-2.059 13.801,0.376 U4.6@14.354,0.376
  Bottom Layer w0.2: MASTER2.29@6.06,-16.88 10.363,-12.577 v1(10.363,-6.045)
10SCL: MASTER1.32 R490.2 U2.9 | length 24.8
  Top Layer w0.2: U2.9@-14.054,1.702 -13.247,1.702 -12.266,2.683 -12.266,4.794 -13.739,6.267 v1(-13.739,10.668) -13.739,11.684 R490.2@-13.764,11.709
  Bottom Layer w0.2: v1(-13.739,10.668) -13.741,10.668 -13.741,10.516 -12.948,11.309 -12.948,14.39 -10.23,17.107 -10.23,20.41 MASTER1.32@-9.18,21.46
10SCL2: MASTER2.32 R480.2 U4.9 | length 23.1
  Top Layer w0.2: v1(14.021,-10.465) 14.021,-11.564 R480.2@14.039,-11.582 ; v1@14.039,-10.465 14.039,-6.077 12.566,-4.605 12.566,-2.556 13.547,-1.575 U4.9@14.354,-1.575
  Bottom Layer w0.2: MASTER2.32@8.6,-19.42 8.6,-18.365 9.65,-17.315 9.65,-16.445 13.202,-12.893 13.202,-11.259 13.995,-10.465 v1(14.021,-10.465)
10SDA: MASTER1.31 R470.2 U2.8 | length 21.9
  Top Layer w0.2: U2.8@-14.054,1.067 -13.316,1.067 -11.866,2.517 -11.866,5.567 v1(-12.548,6.248) -12.548,7.296 R470.2@-12.567,7.315
  Bottom Layer w0.2: v1(-12.548,6.248) -12.548,14.224 -9.18,17.592 MASTER1.31@-9.18,18.92
10SDA2: MASTER2.31 R460.2 U4.8 | length 20.7
  Top Layer w0.2: R460.2@12.867,-7.188 v1(12.867,-5.958) 12.867,-5.91 12.166,-5.209 12.166,-2.39 13.617,-0.94 U4.8@14.354,-0.94
  Bottom Layer w0.2: MASTER2.31@8.6,-16.88 12.802,-12.678 12.802,-5.893 v1(12.867,-5.958)
11SCL: MASTER1.36 R530.2 U2.11 | length 23.5
  Top Layer w0.2: v1@-16.286,10.643 -16.286,6.05 -15.66,5.424 -14.072,5.424 -13.066,4.419 -13.066,3.221 -13.265,3.023 U2.11@-14.054,3.023 ; R530.2@-16.25,11.709 -16.231,11.69 v1(-16.231,10.643)
  Bottom Layer w0.2: v1(-16.231,10.643) -16.205,10.617 -16.205,11.731 -16.224,11.75 -16.224,17.521 -15.411,18.334 -15.411,20.309 MASTER1.36@-14.26,21.46